# Allegro board STUDICATESTER.brd
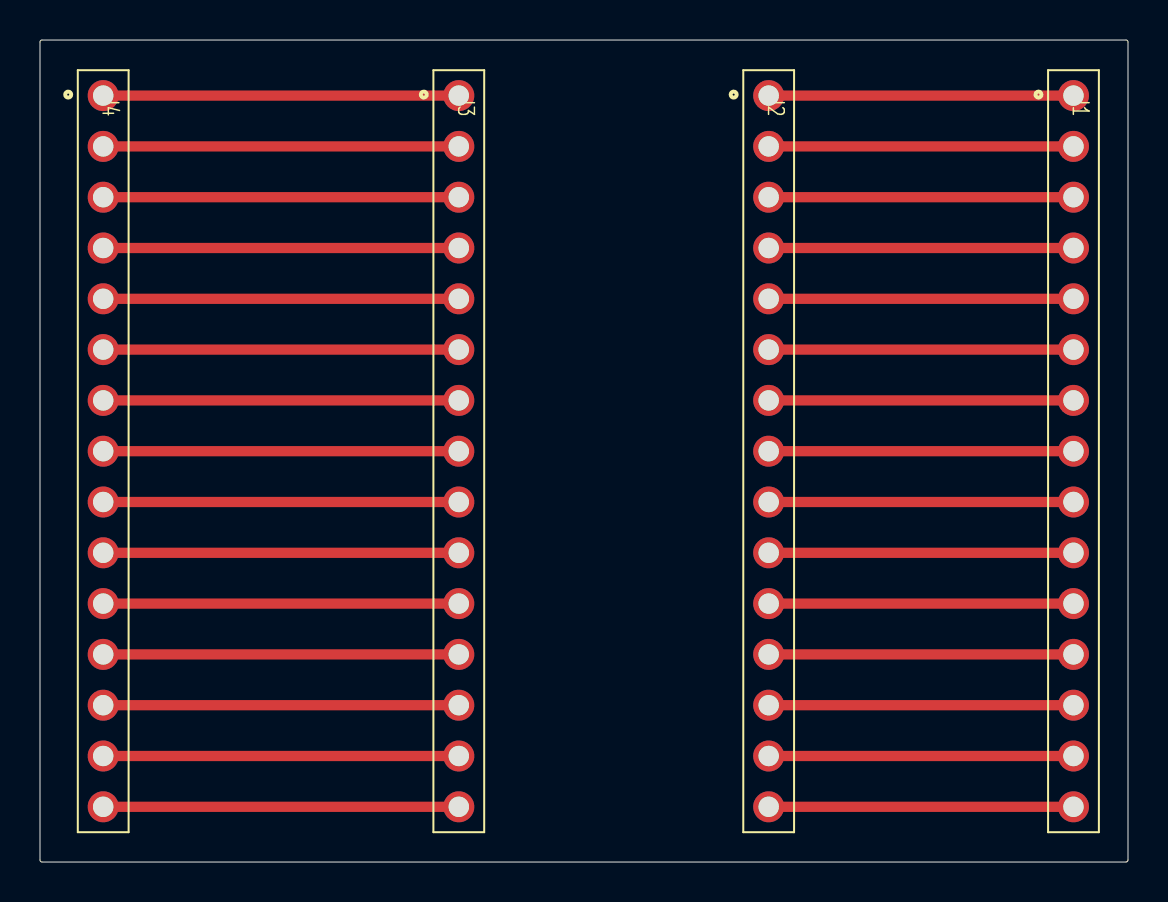
[diagram p0: board, top side]
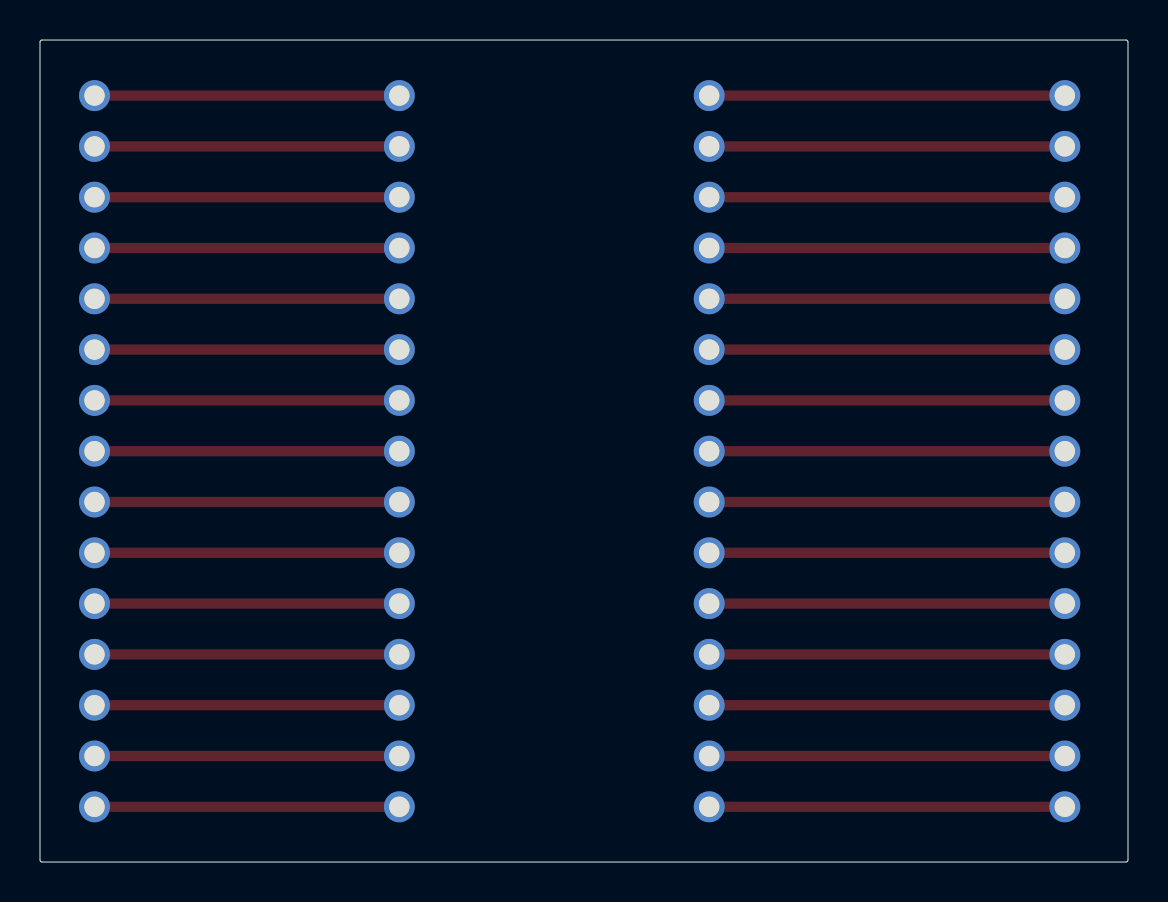
[diagram p1: board, bottom side, seen from below]

Outline 54.4 x 41.1 mm; copper layers: TOP, BOTTOM. Coordinates in mm from the lower left corner of the outline.
Outline path: 0,41 0,0.1 arc(0.03,0.03) 0.1,0 54.3,0 arc(54.37,0.03) 54.4,0.1 54.4,41 arc(54.37,41.07) 54.3,41.1 0.1,41.1 arc(0.03,41.07) 0,41

## Design rules (mm)
constraint set DEFAULT: min track width 0.127

## Placement (name value [footprint] x y rotation side)
J1  TSW-115-05-T-S  [TSW-115-XX-YY-S]  51.67 38.32 270 top
J2  TSW-115-05-T-S  [TSW-115-XX-YY-S]  36.43 38.32 270 top
J3  TSW-115-05-T-S  [TSW-115-XX-YY-S]  20.94 38.32 270 top
J4  TSW-115-05-T-S  [TSW-115-XX-YY-S]  3.16 38.32 270 top

## Library data of the parts
J1-J4 = TSW-115-05-T-S

## Footprints (pads in the part's own frame, mm; a bottom-side part is the same pattern mirrored in y, then rotated)
TSW-115-XX-YY-S
  round 1.55 hole 1.02: 1(0,0) 2(2.54,0) 3(5.08,0) 4(7.62,0) 5(10.16,0) 6(12.7,0) 7(15.24,0) 8(17.78,0) 9(20.32,0) 10(22.86,0) 11(25.4,0) 12(27.94,0) 13(30.48,0) 14(33.02,0) 15(35.56,0)

## Nets
N00220: J3.1 J4.1
N00224: J3.2 J4.2
N00228: J3.3 J4.3
N00232: J3.4 J4.4
N00236: J3.5 J4.5
N00240: J3.6 J4.6
N00244: J3.7 J4.7
N00248: J3.8 J4.8
N00252: J3.9 J4.9
N00256: J3.10 J4.10
N00260: J3.11 J4.11
N00264: J3.12 J4.12
N00268: J3.13 J4.13
N00272: J3.14 J4.14
N00276: J3.15 J4.15
N00280: J1.1 J2.1
N00284: J1.2 J2.2
N00288: J1.3 J2.3
N00292: J1.4 J2.4
N00296: J1.5 J2.5
N00300: J1.6 J2.6
N00304: J1.7 J2.7
N00308: J1.8 J2.8
N00312: J1.9 J2.9
N00316: J1.10 J2.10
N00320: J1.11 J2.11
N00324: J1.12 J2.12
N00328: J1.13 J2.13
N00332: J1.14 J2.14
N00338: J1.15 J2.15

## Routing (per net, layer and track width the routed paths; a pad name or vN(x,y) marks a point on that pad's centre or on a via; arc(x,y) is an arc through that point)
N00220: length 17.8
  TOP w0.512: J4.1 J3.1
N00224: length 17.8
  TOP w0.512: J3.2 J4.2
N00228: length 17.8
  TOP w0.512: J4.3 J3.3
N00232: length 17.8
  TOP w0.512: J3.4 J4.4
N00236: length 17.8
  TOP w0.512: J4.5 J3.5
N00240: length 17.8
  TOP w0.512: J4.6 J3.6
N00244: length 17.8
  TOP w0.512: J3.7 J4.7
N00248: length 17.8
  TOP w0.512: J4.8 J3.8
N00252: length 17.8
  TOP w0.512: J3.9 J4.9
N00256: length 17.8
  TOP w0.512: J4.10 J3.10
N00260: length 17.8
  TOP w0.512: J3.11 J4.11
N00264: length 17.8
  TOP w0.512: J4.12 J3.12
N00268: length 17.8
  TOP w0.512: J4.13 J3.13
N00272: length 17.8
  TOP w0.512: J3.14 J4.14
N00276: length 17.8
  TOP w0.512: J4.15 J3.15
N00280: length 15.2
  TOP w0.512: J2.1 J1.1
N00284: length 15.2
  TOP w0.512: J1.2 J2.2
N00288: length 15.2
  TOP w0.512: J2.3 J1.3
N00292: length 15.2
  TOP w0.512: J2.4 J1.4
N00296: length 15.2
  TOP w0.512: J1.5 J2.5
N00300: length 15.2
  TOP w0.512: J2.6 J1.6
N00304: length 15.2
  TOP w0.512: J1.7 J2.7
N00308: length 15.2
  TOP w0.512: J1.8 J2.8
N00312: length 15.2
  TOP w0.512: J2.9 J1.9
N00316: length 15.2
  TOP w0.512: J2.10 J1.10
N00320: length 15.2
  TOP w0.512: J1.11 J2.11
N00324: length 15.2
  TOP w0.512: J2.12 J1.12
N00328: length 15.2
  TOP w0.512: J1.13 J2.13
N00332: length 15.2
  TOP w0.512: J2.14 J1.14
N00338: length 15.2
  TOP w0.512: J1.15 J2.15
